# EAGLE board a (EAGLE 7.2.0)
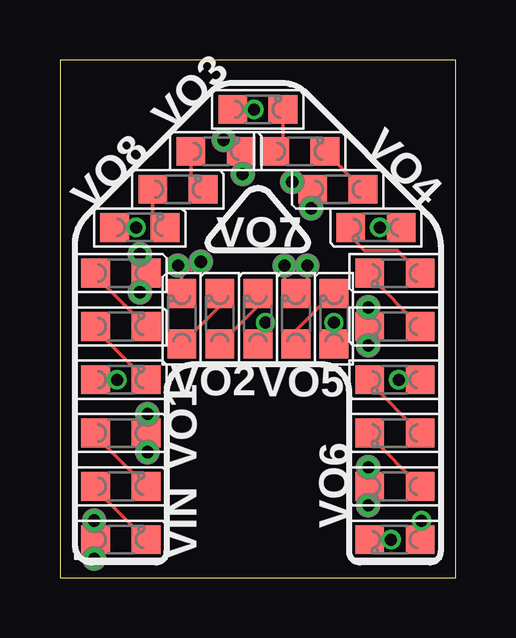
[diagram p0: board, top side]
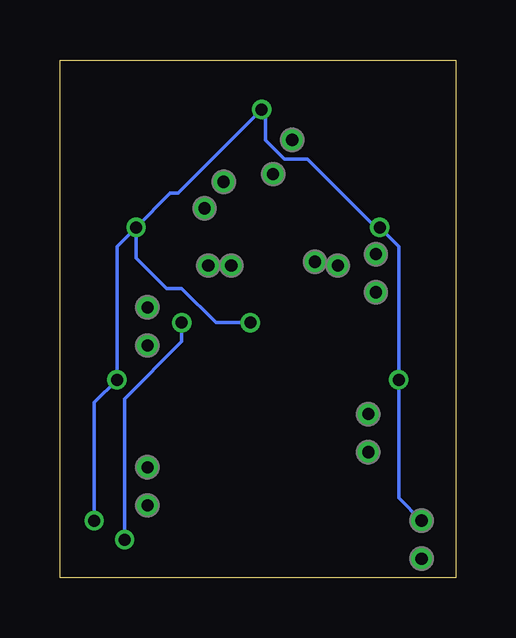
[diagram p1: board, bottom side, seen from below]

Size 16.51 x 21.59 mm. Coordinates in mm from the lower left corner, seen from the top.
Outline: 0,0 16.51,0 16.51,21.59 0,21.59 0,0
Copper layers (1*16): Top 0.035mm / dielectric 1.5mm / Bottom 0.035mm
Design rules "Fusion_eagle_rule_v1.1_tms *": minimum track width 6mil, minimum drill 12mil, track to track 6mil, track to pad 6mil, pad to pad 6mil, via to via 6mil, smd to smd 0mil, copper to edge 10mil, drill to drill 10mil, minimum pad ring 10mil, minimum via ring 6mil, stop-mask expansion 2mil, vias tented up to drill 100mil, thermal gap 10mil

## Footprints (pad centres in the part's own frame; a part is rotated, then mirrored left to right if it is on the bottom)
LED_0805 = smd 1.2 x 1.2: A 0,-1.05; C 0,1.05
P1-20 = drill 0.508: TP 0,0

## Placement (x,y rotation side)
LED1  [LED_0805]  2.54,1.59 270 top
LED2  [LED_0805]  2.54,3.81 270 top
LED3  [LED_0805]  2.54,6.03 270 top
LED4  [LED_0805]  2.54,8.26 270 top
LED5  [LED_0805]  2.54,10.48 270 top
LED6  [LED_0805]  2.54,12.7 270 top
LED7  [LED_0805]  3.33,14.61 270 top
LED8  [LED_0805]  4.92,16.19 270 top
LED9  [LED_0805]  6.51,17.78 270 top
LED10  [LED_0805]  8.26,19.53 270 top
LED11  [LED_0805]  10,17.78 270 top
LED12  [LED_0805]  11.59,16.19 90 top
LED13  [LED_0805]  13.18,14.61 90 top
LED14  [LED_0805]  13.97,12.7 90 top
LED15  [LED_0805]  13.97,10.48 90 top
LED16  [LED_0805]  13.97,8.26 90 top
LED17  [LED_0805]  13.97,6.03 90 top
LED18  [LED_0805]  13.97,3.81 90 top
LED19  [LED_0805]  13.97,1.59 90 top
LED20  [LED_0805]  11.43,10.79 0 top
LED21  [LED_0805]  9.84,10.79 0 top
LED22  [LED_0805]  8.26,10.79 0 top
LED23  [LED_0805]  6.67,10.79 0 top
LED24  [LED_0805]  5.08,10.79 0 top
VIN  [P1-20]  1.43,0.79 0 top
VIN1  [P1-20]  1.43,2.38 0 top
VO1  [P1-20]  3.65,5.24 0 top
VO2  [P1-20]  3.33,11.91 0 top
VO3  [P1-20]  7.62,16.83 0 top
VO4  [P1-20]  10.48,15.4 0 top
VO5  [P1-20]  12.86,11.27 0 top
VO6  [P1-20]  12.86,3.02 0 top
VO7  [P1-20]  10.32,13.02 0 top
VO8  [P1-20]  5.87,13.18 0 top
VO9  [P1-20]  3.65,6.83 0 top
VO10  [P1-20]  3.33,13.49 0 top
VO11  [P1-20]  6.83,18.26 0 top
VO12  [P1-20]  9.68,16.51 0 top
VO13  [P1-20]  12.86,9.68 0 top
VO14  [P1-20]  12.86,4.6 0 top
VO15  [P1-20]  9.37,13.02 0 top
VO16  [P1-20]  4.92,13.02 0 top

## Library data of the parts
LED1-LED24 VIN VIN1 VO1-VO16 = CyberRailGuru

## Nets
N$1: LED22.C LED23.A
N$2: LED23.C LED24.A
N$3: LED2.C LED3.A
N$4: LED1.C LED2.A
N$5: LED24.C VO8.TP VO16.TP
N$7: LED5.C LED6.A
N$8: LED4.C LED5.A
N$11: LED8.C LED9.A
N$12: LED7.C LED8.A
N$15: LED11.C LED12.A
N$16: LED10.C LED11.A
N$19: LED14.C LED15.A
N$20: LED13.C LED14.A
N$23: LED17.C LED18.A
N$24: LED16.C LED17.A
N$27: LED20.C LED21.A
N$28: LED19.C LED20.A
VIN: LED1.A LED4.A LED7.A LED10.A LED13.A LED16.A LED19.A LED22.A VIN1.TP VIN.TP
VOUT1: LED3.C VO1.TP VO9.TP
VOUT2: LED6.C VO2.TP VO10.TP
VOUT3: LED9.C VO3.TP VO11.TP
VOUT4: LED12.C VO4.TP VO12.TP
VOUT5: LED15.C VO5.TP VO13.TP
VOUT6: LED18.C VO6.TP VO14.TP
VOUT7: LED21.C VO7.TP VO15.TP

## Tracks (layer width: path | path; a pad name or v marks a point on that pad's centre or on a via)
N$1
  Top 0.152: LED22.C 8.26,11.33 LED23.A
N$2
  Top 0.152: LED23.C 6.67,11.33 LED24.A
N$3
  Top 0.152: LED3.A 1.49,5.91 LED2.C
N$4
  Top 0.152: LED2.A 1.49,3.69 LED1.C
N$5
  Top 0.152: LED24.C 5.08,12.86 | 5.08,12.86 VO16.TP | 5.08,12.86 5.56,12.86 VO8.TP
N$7
  Top 0.152: LED6.A 1.49,12.58 LED5.C
N$8
  Top 0.152: LED5.A 1.49,10.36 LED4.C
N$11
  Top 0.152: LED9.A 5.46,16.7 LED8.C
N$12
  Top 0.152: LED8.A 3.87,15.12 LED7.C
N$15
  Top 0.152: LED11.C LED12.A
N$16
  Top 0.152: LED10.C 9.3,18.13 LED11.A
N$19
  Top 0.152: LED14.C 12.92,12.58 LED15.A
N$20
  Top 0.152: LED13.C 12.13,14.23 12.7,13.65 14.07,13.65 LED14.A
N$23
  Top 0.152: LED17.C 12.92,5.91 LED18.A
N$24
  Top 0.152: LED16.C 12.92,8.13 LED17.A
N$27
  Top 0.152: LED20.C 11.37,11.85 9.84,10.32 LED21.A
N$28  (via drill 0.5)
  Top 0.152: LED19.C v13.81,1.59 | LED20.A v11.43,10.64
  Bottom 0.152: v13.81,1.59 13.81,7.46 11.43,9.84 v11.43,10.64
VIN  (via drill 0.5)
  Top 0.152: VIN.TP 1.43,1.53 LED1.A 1.43,1.65 VIN1.TP | LED13.A v13.34,14.61 | LED16.A v14.13,8.26 | LED10.A v8.1,19.53 | LED7.A v3.17,14.61 | LED4.A v2.38,8.26 | v15.08,2.38 15.08,1.65 LED19.A | LED22.A 8.26,10.32 v8.57,10.64
  Bottom 0.152: v13.34,14.61 14.13,13.81 v14.13,8.26 15.08,7.3 v15.08,2.38 | v13.34,14.61 11.91,16.03 11.59,16.03 v8.1,19.53 7.94,19.37 7.94,18.26 7.14,17.46 6.19,17.46 3.33,14.61 v3.17,14.61 2.38,13.81 v2.38,8.26 2.38,3.33 VIN1.TP | v13.34,14.61 13.34,13.34 12.06,12.06 11.43,12.06 10,10.64 v8.57,10.64
VOUT1
  Top 0.152: VO1.TP 3.65,5.97 LED3.C 3.65,6.09 VO9.TP
VOUT2
  Top 0.152: VO2.TP 3.33,12.44 LED6.C 3.33,12.96 VO10.TP
VOUT3
  Top 0.152: VO3.TP 7.62,17.72 LED9.C 7.08,18.26 VO11.TP
VOUT4
  Top 0.152: VO12.TP 10.22,16.51 LED12.C 10.48,16.13 VO4.TP
VOUT5
  Top 0.152: VO5.TP 12.86,10.54 LED15.C 12.86,10.42 VO13.TP
VOUT6
  Top 0.152: VO14.TP 12.86,3.87 LED18.C 12.86,3.75 VO6.TP
VOUT7
  Top 0.152: VO15.TP 9.37,12.32 LED21.C 10.32,12.32 VO7.TP

## Text on the board
201bmp: A